# Altium PCB CameraJPEG.PcbDoc
Units mm, origin at the board's own origin, x right, y up, seen from the top; angles counter-clockwise.
Board outline 39.24 x 43.43 mm, 2 copper layers (Top Layer, Bottom Layer); 64 components, 59 nets, 243 pads, 8 vias.
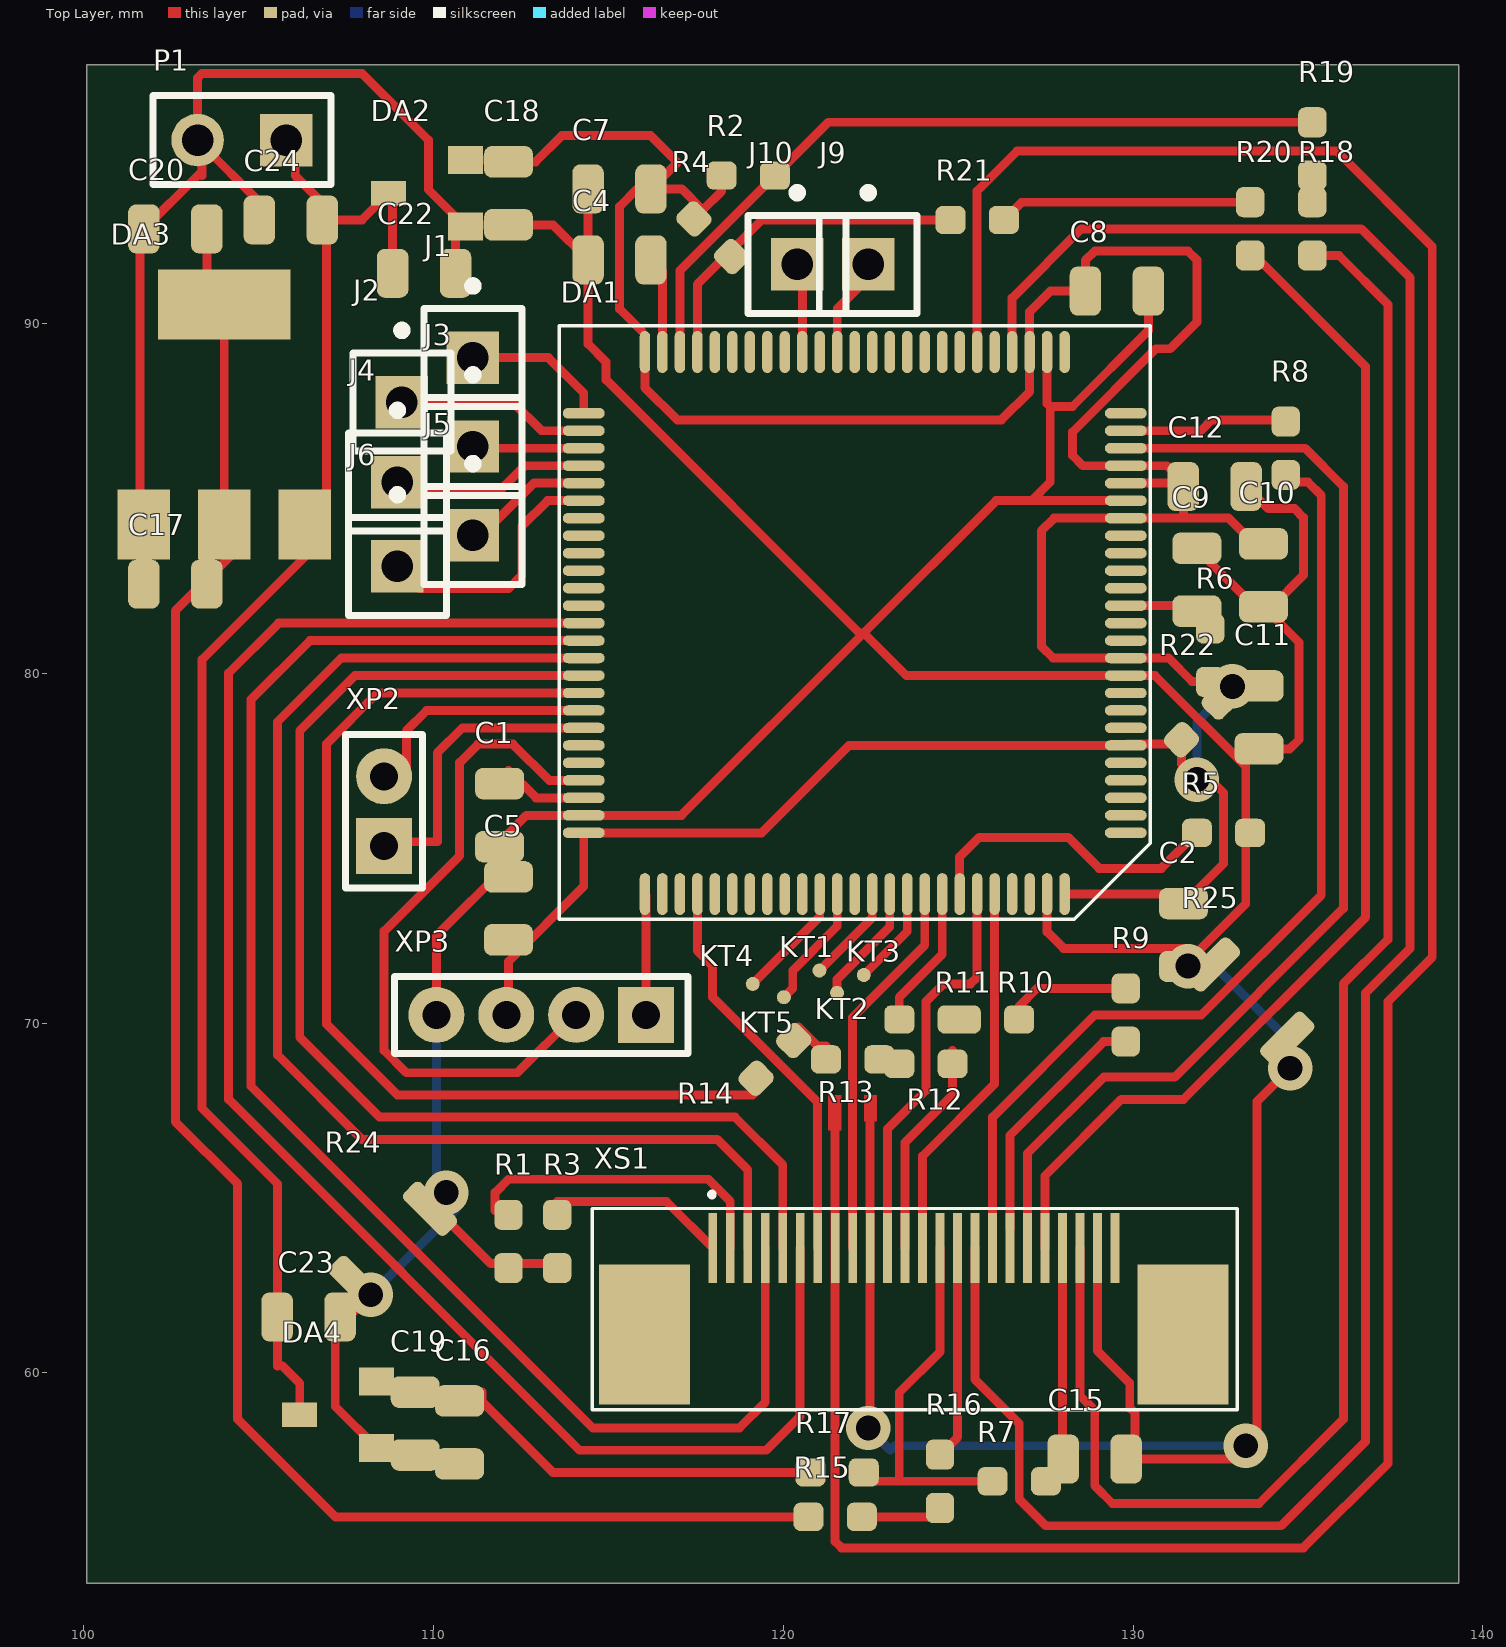
[diagram p0: Top Layer view]
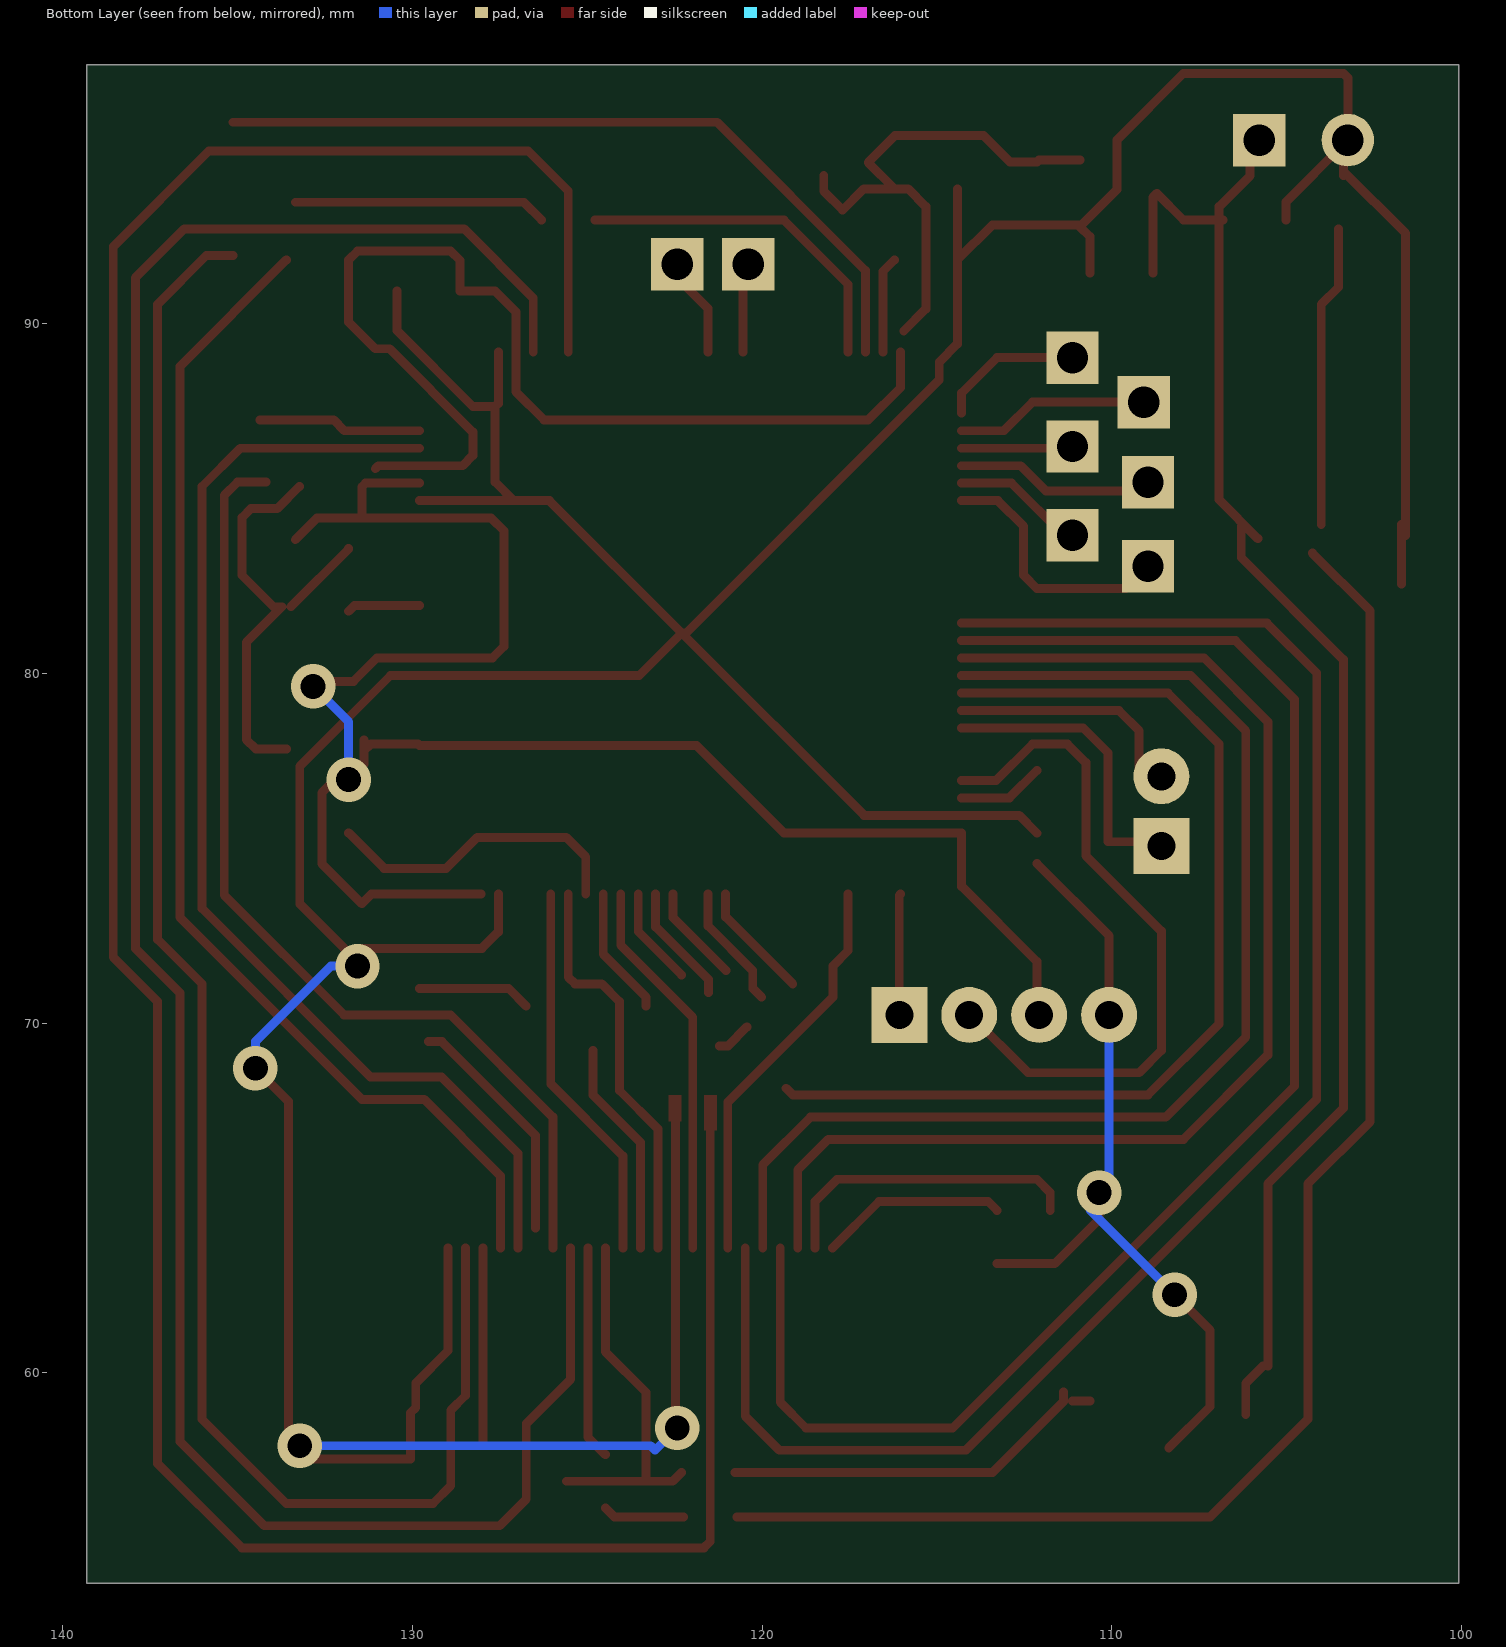
[diagram p1: Bottom Layer view, seen from below]
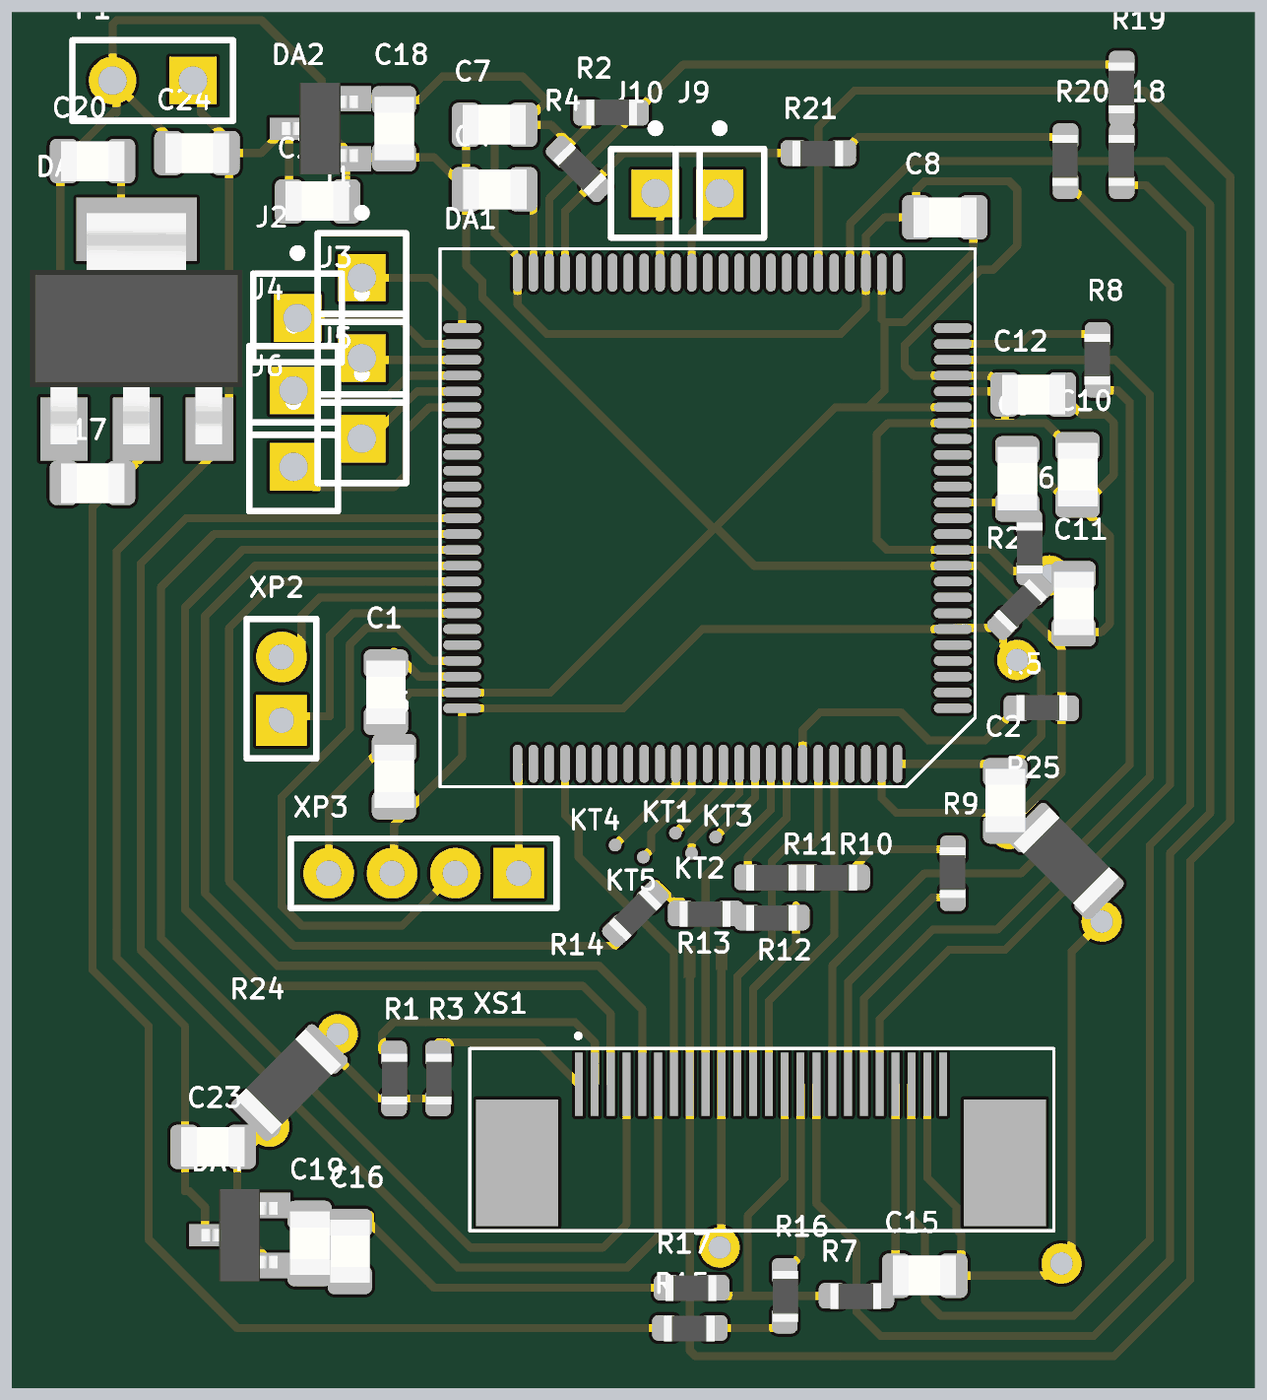
[diagram p2: 3D render of the assembled board from above, using the file's embedded part models]

## Layer stack, top to bottom
Top Solder: solder mask 0.0102, Solder Resist, Dk 3.5
Top Layer: signal copper 0.0356
Dielectric 1: dielectric 0.32, FR-4, Dk 4.8
Bottom Layer: signal copper 0.0356
Bottom Solder: solder mask 0.0102, Solder Resist, Dk 3.5

## Board outline
100.076,53.975 100.076,97.409 139.319,97.409 139.319,53.975

## Design rules (kind name [scope] priority, off if disabled: settings)
Clearance [All] p1: gap=0.1
ComponentClearance [All] p1 off: gap=0.254 collisioncheckmode=3 verticalgap=0.254 showdistances=FALSE
MinimumSolderMaskSliver [All] p1 off: minsoldermaskwidth=0.254
PolygonConnect [All] p1: connectstyle=Relief reliefconductorwidth=0.254 reliefentries=4 polygonreliefangle="90 Angle" airgapwidth=0.254
RoutingVias [All] p1: holewidth=0.711 width=1.27 viastyle="Through Hole" minholewidth=0.711 minwidth=1.27 maxholewidth=0.711 maxwidth=1.27
SilkToSilkClearance [All] p1 off: silktosilkclearance=0.254
SilkToSolderMaskClearance [IsPad] p1 off: minsilkscreentomaskgap=0.254 clearancetoexposedcopper=TRUE
SolderMaskExpansion [All] p1: expansion=0.102
Width [All] p1: maxlimit=0.254 minlimit=0.254 preferedwidth=0.254
26 further rules are at their usual default settings.

## Components (designator, comment, footprint, x,y, rotation, side; value= is the part's Value field where it differs from the comment)
C1 "0.1uF" CAP0805 111.887,75.946 r270 top
C2 "0.1uF" CAP0805 131.445,72.517 r90 top
C4 "0.1uF" CAP0805 115.316,91.821 r0 top
C5 "0.1uF" CAP0805 112.141,73.279 r90 top
C7 "0.1uF" CAP0805 115.316,93.853 r180 top
C8 "0.1uF" CAP0805 129.54,90.932 r0 top
C9 "0.1uF" CAP0805 131.826,82.677 r90 top
C10 "0.1uF" CAP0805 133.731,82.804 r90 top
C11 "0.1uF" CAP0805 133.604,78.74 r90 top
C12 "0.1uF" CAP0805 132.334,85.344 r0 top
C15 "4.7uF" CAP0805 128.905,57.531 r180 top
C16 "4.7uF" CAP0805 110.744,58.293 r90 top
C17 "4.7uF" CAP0805 102.616,82.55 r0 top
C18 "1uF" CAP0805 112.141,93.726 r90 top
C19 "0.22uF" CAP0805 109.474,58.547 r90 top
C20 "1uF" CAP0805 102.616,92.71 r0 top
C22 "0.22uF" CAP0805 109.728,91.44 r180 top
C23 "0.22uF" CAP0805 106.426,61.595 r180 top
C24 "1uF" CAP0805 105.918,92.964 r0 top
DA1 "STM32F407VGT6" STM32F407VGT6 129.794,75.438 r180 top
DA2 "MCP1702T-3002E" SOT23 108.712,93.726 r90 top
DA3 "LD1117S12TR" SOT-223 104.013,90.551 r0 top
DA4 "MCP1702T-3002E" SOT23 106.172,58.801 r90 top
J1 "Socket" PIN1 111.125,89.027 r0 top
J2 "Socket" PIN1 109.093,87.757 r0 top
J3 "Socket" PIN1 111.125,86.487 r0 top
J4 "Socket" PIN1 108.966,85.471 r0 top
J5 "Socket" PIN1 111.125,83.947 r0 top
J6 "Socket" PIN1 108.966,83.058 r0 top
J9 "Socket" PIN1 122.428,91.694 r0 top
J10 "Socket" PIN1 120.396,91.694 r0 top
KT1 "*" PAD 121.031,71.501 r90 top
KT2 "*" PAD 121.539,70.866 r90 top
KT3 "*" PAD 122.301,71.374 r90 top
KT4 "*" PAD 119.126,71.12 r90 top
KT5 "*" PAD 120.015,70.739 r90 top
P1 "Header 2" HDR1X2 105.791,95.25 r180 top
R1 "10k" RES0603 112.141,63.754 r270 top
R2 "10k" RES0603 118.999,94.234 r0 top
R3 "10k" RES0603 113.538,63.754 r270 top
R4 "10k" RES0603 117.983,92.456 r315 top
R5 "10k" RES0603 132.588,75.438 r0 top
R6 "10k" RES0603 132.207,80.518 r270 top
R7 "5.1k" RES0603 126.746,56.896 r180 top
R8 "0" RES0603 134.366,86.438 r90 top
R9 "0" RES0603 129.794,70.231 r90 top
R10 "0" RES0603 125.984,70.104 r180 top
R11 "0" RES0603 124.079,70.104 r180 top
R12 "0" RES0603 124.079,68.834 r180 top
R13 "0" RES0603 121.983,68.961 r180 top
R14 "0" RES0603 119.761,68.961 r225 top
R15 "0" RES0603 121.483,55.88 r180 top
R16 "0" RES0603 124.483,56.896 r270 top
R17 "0" RES0603 121.539,57.15 r180 top
R18 "0" RES0603 135.128,92.71 r90 top
R19 "0" RES0603 135.128,94.996 r90 top
R20 "0" RES0603 133.35,92.71 r90 top
R21 "0" RES0603 125.544,92.964 r180 top
R22 "0" RES0603 131.926,78.64 r45 top
R24 "0" RES1206 108.839,63.627 r45 top
R25 "0" RES1206 133.35,70.612 r315 top
XP2 "Вилка PLS2-2" PLS2-2 108.585,75.057 r180 top
XP3 "Вилка PLS2-4" PLS2-4 116.078,70.231 r270 top
XS1 "Розетка" "Розетка под FPC_1" 117.983,61.722 r90 top

## Footprints (in the part's own frame and the unit in brackets; to place one, negate y for a bottom-side part, rotate by r counter-clockwise, add the part's x,y. Pads: shape width x height; smd on the part's side, far side on the other; paste and mask are expansions set on the pad)
CAP0805 [mm]
  rrect50% 0.9x1.4 smd: 1(-0.9,0) 2(0.9,0)
  body extent -0.99,-0.63 1.01,0.62, height 1.3
HDR1X2 [mm] "Connector; Header; 2 Position"
  rect 1.5x1.5 hole 0.9: 1(0,0)
  round 1.5 hole 0.9: 2(2.54,0)
  silkscreen extent -1.27,-1.27 3.81,1.27
PAD [mm]
  round 0.4 smd: 1(0,0)
PIN1 [mm] "Connector; Plug"
  rect 1.5x1.5 hole 0.9: 1(0,0)
  silkscreen extent -1.4,-1.4 1.4,2.17
PLS2-2 [mm]
  rect 1.6x1.6 hole 0.8: 1(0,0)
  round 1.6 hole 0.8: 2(0,-2)
  silkscreen extent -1.1,-3.2 1.1,1.2
PLS2-4 [mm]
  rect 1.6x1.6 hole 0.8: 1(0,0)
  round 1.6 hole 0.8: 2(0,-2) 3(0,-4) 4(0,-6)
  silkscreen extent -1.1,-7.2 1.1,1.2
RES0603 [mm]
  rrect50% 0.86x0.81 smd: 1(-0.762,0) 2(0.762,0)
  body extent -0.78,-0.38 0.82,0.42, height 0.45
RES1206 [mm]
  rrect50% 0.7x1.7 smd: 1(-1.5,0) 2(1.5,0)
  body extent -1.55,-0.76 1.55,0.84, height 0.55
SOT23 [mm]
  rect 0.8x1 smd: 1(-0.95,-2.2) 2(0.95,-2.2)
  rect 0.7x1 smd: 3(0,0)
  body extent -1.44,-2.29 1.46,0.11, height 1.02
SOT-223 [mm]
  rect 1.5x2 smd: 1(-2.3,-6.3) 2(0,-6.3) 3(2.3,-6.3)
  rect 3.8x2 smd: 4(0,0)
  body extent -3.36,-6.77 3.35,0.52, height 1.8
STM32F407VGT6 [mm]
  oval 1.2x0.3 smd: 1(0,0) 2(0,-0.5) 3(0,-1) 4(0,-1.5) 5(0,-2) 6(0,-2.5) 7(0,-3) 8(0,-3.5) 9(0,-4) 10(0,-4.5) 11(0,-5) 12(0,-5.5) 13(0,-6) 14(0,-6.5) 15(0,-7) 16(0,-7.5) 17(0,-8) 18(0,-8.5) 19(0,-9) 20(0,-9.5) 21(0,-10) 22(0,-10.5) 23(0,-11) 24(0,-11.5) 25(0,-12) 51(15.5,-12) 52(15.5,-11.5) 53(15.5,-11) 54(15.5,-10.5) 55(15.5,-10) 56(15.5,-9.5) 57(15.5,-9) 58(15.5,-8.5) 59(15.5,-8) 60(15.5,-7.5) 61(15.5,-7) 62(15.5,-6.5) 63(15.5,-6) 64(15.5,-5.5) 65(15.5,-5) 66(15.5,-4.5) 67(15.5,-4) 68(15.5,-3.5) 69(15.5,-3) 70(15.5,-2.5) 71(15.5,-2) 72(15.5,-1.5) 73(15.5,-1) 74(15.5,-0.5) 75(15.5,0)
  oval 0.3x1.2 smd: 26(1.75,-13.75) 27(2.25,-13.75) 28(2.75,-13.75) 29(3.25,-13.75) 30(3.75,-13.75) 31(4.25,-13.75) 32(4.75,-13.75) 33(5.25,-13.75) 34(5.75,-13.75) 35(6.25,-13.75) 36(6.75,-13.75) 37(7.25,-13.75) 38(7.75,-13.75) 39(8.25,-13.75) 40(8.75,-13.75) 41(9.25,-13.75) 42(9.75,-13.75) 43(10.25,-13.75) 44(10.75,-13.75) 45(11.25,-13.75) 46(11.75,-13.75) 47(12.25,-13.75) 48(12.75,-13.75) 49(13.25,-13.75) 50(13.75,-13.75) 76(13.75,1.75) 77(13.25,1.75) 78(12.75,1.75) 79(12.25,1.75) 80(11.75,1.75) 81(11.25,1.75) 82(10.75,1.75) 83(10.25,1.75) 84(9.75,1.75) 85(9.25,1.75) 86(8.75,1.75) 87(8.25,1.75) 88(7.75,1.75) 89(7.25,1.75) 90(6.75,1.75) 91(6.25,1.75) 92(5.75,1.75) 93(5.25,1.75) 94(4.75,1.75) 95(4.25,1.75) 96(3.75,1.75) 97(3.25,1.75) 98(2.75,1.75) 99(2.25,1.75) 100(1.75,1.75)
  silkscreen extent -0.7,-14.5 16.2,2.47, body extent -0.7,-14.45 16.2,2.45, height 1.6
"Розетка под FPC_1" [mm]
  rect 2x0.25 smd: 1(1.85,0) 2(1.85,-0.5) 3(1.85,-1) 4(1.85,-1.5) 5(1.85,-2) 6(1.85,-2.5) 7(1.85,-3) 8(1.85,-3.5) 9(1.85,-4) 10(1.85,-4.5) 11(1.85,-5) 12(1.85,-5.5) 13(1.85,-6) 14(1.85,-6.5) 15(1.85,-7) 16(1.85,-7.5) 17(1.85,-8) 18(1.85,-8.5) 19(1.85,-9) 20(1.85,-9.5) 21(1.85,-10) 22(1.85,-10.5) 23(1.85,-11) 24(1.85,-11.5)
  rect 4x2.6 smd: ""(-0.625,1.95) ""(-0.625,-13.45)
  silkscreen extent -2.78,-15 3.38,3.45, body extent -2.73,-14.85 2.95,3.35, height 2

## Part data
C1 C2 C4 C5 C7 C8 C9 C10 C11 C12 C15 C16 C17 C18 C19 C20 C22 C23 C24: library part Capacitor
DA2 DA4: library part 2N7002
DA3: library part DA-AMS1117, "LDO 3.3V 0.5A"
KT1 KT2 KT3 KT4 KT5: library part KT
P1: "Header, 2-Pin"
R1 R2 R3 R4 R5 R6 R7 R8 R9 R10 R11 R12 R13 R14 R15 R16 R17 R18 R19 R20 R21 R22 R24 R25: library part Resistor
XS1: library part "Розетка на плату под шлейф 24_1"

## Via types
v1: diameter 1.27, hole 0.711, Top Layer to Bottom Layer, 8 vias

## Nets (pads, with @x,y where several pads share a name; then routed paths per layer and width w, separated by ;. In a path a pad name is that pad's centre, name@x,y a point inside that pad or via, vN(x,y) a via of type N, cw(c..) or ccw(c..) an arc to the next point about the centre after c; other vN are vias at no path point)
+3,0B: C2.2 C5.1 C7.1 C8.1 C10.2 C11.2 C12.1 C18.2 DA1.6 DA1.11 DA1.19 DA1.21 DA1.22 DA1.28 DA1.50 DA1.75 DA1.100 DA2.2 R2.1 R4.1 R6.2 R22.1 R22.2 XP3.3 | length 101.3
  Top Layer w0.254: DA2.2 112.091,94.676 C18.2 112.914,94.626 113.665,95.377 116.205,95.377 116.967,94.615 116.967,94.604 C7.1 ; XP3.3 112.141,70.294 112.141,71.755 114.294,73.908 DA1.75 119.38,75.438 121.88,77.938 DA1.6 129.834,77.978 131.191,77.978 R22.1@131.387,77.782 ; 115.951,89.789 115.316,90.424 115.316,93.345 115.824,93.853 C7.1 ; DA1.50 116.044,88.172 116.967,87.249 126.238,87.249 127.044,88.055 DA1.28 127.044,90.341 127.635,90.932 C8.1 128.64,91.81 128.905,92.075 131.572,92.075 131.826,91.821 131.826,90.043 131.064,89.281 130.654,89.281 128.27,86.897 128.27,86.233 128.565,85.938 DA1.22 130.978,85.938 C12.1@131.064,85.852 ; R2.1 118.237,93.788 117.698,93.249 117.094,93.853 C7.1 ; DA1.100 131.174,73.688 C2.2 132.588,74.56 132.588,76.581 v1@132.017,77.153 ; DA1.21 131.34,85.438 C12.1 131.445,85.333 131.445,84.438 ; R22.1 R22.1@131.387,77.782 ; v1(131.826,76.962) 131.387,77.401 R22.1@131.387,77.782 ; R6.2@132.207,79.767 131.688,79.767 131.017,80.438 DA1.11 127.715,80.438 127.381,80.772 127.381,84.074 127.745,84.438 DA1.19 131.445,84.438 ; C10.2@133.35,83.82 132.732,84.438 131.445,84.438
  Bottom Layer w0.254: v1(131.826,76.962) 131.826,78.613 v1(132.842,79.629)
+3,4B: C22.2 C23.2 C24.2 DA2.3 DA3.3 DA4.3 P1.1 | length 44.2
  Top Layer w0.254: 105.537,60.198 105.537,65.405 103.378,67.564 103.378,80.391 106.299,83.312 DA3.3@106.299,84.201 ; 105.675,60.198 106.172,59.701 DA4.3 ; DA3.3@105.823,83.852 106.934,84.963 C24.2@106.934,92.964 ; P1.1@106.045,94.996 106.045,94.234 106.934,93.345 C24.2@106.934,92.964 ; C24.2 C24.2@106.934,92.964 ; C22.2 108.828,93.61 DA2.3 107.95,92.964 C24.2@106.934,92.964
AVDD: C15.2 R7.1 XS1.21 | length 5.6
  Top Layer w0.254: C15.2@127.983,58.006 XS1.21
BOOT0: DA1.94 R5.1 | length 8.9
  Top Layer w0.254: DA1.94 125.044,74.752 125.603,75.311 128.143,75.311 129.032,74.422 130.81,74.422 R5.1
CE: DA1.55 J5.1 | length 3.8
  Top Layer w0.254: J5.1 111.379,83.947 112.87,85.438 DA1.55
CSN: DA1.56 J6.1 | length 7.5
  Top Layer w0.254: J6.1 109.601,82.423 112.141,82.423 112.522,82.804 112.522,84.201 113.259,84.938 DA1.56
D0: DA1.63 XS1.6 | length 48.7
  Top Layer w0.254: DA1.63 105.568,81.438 104.14,80.01 104.14,67.818 114.173,57.785 119.507,57.785 120.483,58.761 XS1.6
D1: DA1.64 XS1.4 | length 44.7
  Top Layer w0.254: DA1.64 106.465,80.938 104.775,79.248 104.775,68.199 114.554,58.42 118.745,58.42 119.483,59.158 XS1.4
D2: DA1.65 XS1.3 | length 36.1
  Top Layer w0.254: DA1.65 107.362,80.438 105.537,78.613 105.537,69.088 107.95,66.675 118.11,66.675 118.983,65.802 XS1.3
D3: DA1.66 XS1.5 | length 35.2
  Top Layer w0.254: DA1.66 114.294,79.936 107.749,79.936 106.172,78.359 106.172,69.596 108.458,67.31 118.618,67.31 119.983,65.945 XS1.5
D4: DA1.79 XS1.7 | length 11.5
  Top Layer w0.254: DA1.79 117.544,72.067 117.972,71.639 117.972,70.75 120.983,67.739 XS1.7
D5: DA1.92 XS1.9 | length 11
  Top Layer w0.254: XS1.9 121.983,70.167 124.044,72.228 DA1.92
D6: DA1.95 XS1.11 | length 11.6
  Top Layer w0.254: XS1.11 122.983,66.976 124.079,68.072 124.079,70.612 124.587,71.12 125.349,71.12 125.544,71.315 DA1.95
D7: DA1.96 XS1.13 | length 11
  Top Layer w0.254: XS1.13 123.983,66.198 126.044,68.259 DA1.96
DOVDD: R7.2 R17.1 XS1.14 | length 10.6
  Top Layer w0.254: R17.1 122.555,56.896 123.317,56.896 ; XS1.14 124.483,60.602 123.317,59.436 123.317,56.896 ; R7.2@125.603,56.896 123.317,56.896
DVDD: R16.1 XS1.15 | length 6.1
  Top Layer w0.254: R16.1 124.983,58.158 XS1.15
GND: C1.2 C2.1 C4.1 C5.2 C7.2 C8.2 C9.2 C10.1 C11.1 C12.2 C15.1 C16.1 C17.1 C18.1 C19.1 C20.1 C22.1 C23.1 C24.1 DA1.10 DA1.20 DA1.27 DA1.74 DA1.99 DA2.1 DA3.1 DA4.1 P1.2 R1.2 R3.2 R5.2 R24.1 R24.2 R25.1 R25.2 XP3.4 XS1.10 XS1.23 | length 189.5
  Top Layer w0.254: DA3.1@101.6,83.947 101.6,92.583 103.378,94.361 ; DA3.1 101.716,84.248 C17.1 ; 103.378,94.234 103.378,94.361 ; C24.1 105.018,93.483 P1.2@103.378,95.123 ; R24.1@107.95,61.976 v1(108.204,62.23) v1@108.413,62.439 ; R24.1@108.077,62.103 107.188,61.214 107.188,59.035 DA4.1 ; XP3.4 110.078,72.497 C5.2@112.141,74.56 ; v1(110.363,65.151) 110.363,64.389 111.633,63.119 R3.2@113.284,63.119 ; C22.1 110.628,92.492 DA2.1 ; C1.2@112.141,75.427 112.652,75.938 DA1.74 117.086,75.938 122.301,81.153 ; C7.2 C4.1 ; v1(122.428,58.42) 122.483,58.475 XS1.10 122.483,67.818 ; DA1.99 127.544,72.608 128.016,72.136 v1@131.445,72.136 ; DA1.27 127.544,87.721 127.635,87.63 ; XS1.23 128.983,60.628 129.906,59.705 129.906,59.003 130.059,58.85 130.059,57.531 v1@133.35,57.531 ; DA1.20 127.102,84.938 ; C8.2 130.44,89.8 128.27,87.63 127.635,87.63 ; C2.1 131.561,71.617 v1(131.572,71.628) ; C9.2 131.826,83.555 C10.1@133.477,81.904 ; 131.953,72.136 133.223,73.406 133.223,77.343 130.628,79.938 DA1.10 123.516,79.938 122.301,81.153 ; C12.2 133.869,84.709 134.62,84.709 134.874,84.455 134.874,82.804 133.974,81.904 C10.1 134.747,80.888 134.747,78.105 134.482,77.84 C11.1 ; v1@133.541,57.594 133.541,67.754 v1(134.493,68.707) 134.493,69.469 R25.2 ; 103.378,94.361 P1.2@103.378,95.123 ; P1.2@103.378,95.123 P1.2 103.251,97.028 103.378,97.155 107.95,97.155 109.855,95.25 109.855,93.833 DA2.1 ; DA2.1 110.962,92.826 C18.1 113.411,92.826 C4.1 ; C4.1 114.416,89.419 114.935,88.9 114.935,88.392 122.174,81.153 122.301,81.153 ; 122.301,81.153 126.086,84.938 127.102,84.938 ; 127.102,84.938 127.635,85.471 127.635,87.63
  Bottom Layer w0.254: v1(108.204,62.23) 110.617,64.643 110.617,64.897 v1(110.363,65.151) 110.078,65.436 XP3.4 ; v1(122.428,58.42) 123.063,57.785 123.19,57.912 v1(133.223,57.912) ; v1(131.572,71.628) 132.334,71.628 134.493,69.469 v1(134.493,68.707)
HREF: DA1.29 XS1.16 | length 67.1
  Top Layer w0.254: XS1.16 125.483,59.817 125.476,59.817 126.746,58.547 126.746,56.388 127.508,55.626 134.239,55.626 136.652,58.039 136.652,70.866 137.922,72.136 137.922,91.313 136.525,92.71 128.524,92.71 126.544,90.73 DA1.29
IRQ: DA1.51 J1.1 | length 4.2
  Top Layer w0.254: J1.1 113.284,89.027 114.294,88.017 DA1.51
KT1: DA1.89 KT1.1 | length 2.8
  Top Layer w0.254: KT1.1 122.544,73.014 DA1.89
KT2: DA1.90 KT2.1 | length 3.4
  Top Layer w0.254: KT2.1 121.539,71.247 123.044,72.752 DA1.90
KT3: DA1.91 KT3.1 | length 2.8
  Top Layer w0.254: KT3.1 123.544,72.617 DA1.91
KT4: DA1.86 KT4.1 | length 3.4
  Top Layer w0.254: KT4.1 121.044,73.038 DA1.86
KT5: DA1.87 KT5.1 | length 3.6
  Top Layer w0.254: KT5.1 120.269,70.993 120.269,71.501 121.544,72.776 DA1.87
NetC1_1: C1.1 DA1.73 | length 2.5
  Top Layer w0.254: C1.1@112.141,77.227 112.93,76.438 DA1.73
NetC4_2: C4.2 DA1.49 | length 2.8
  Top Layer w0.254: C4.2 116.544,91.493 DA1.49
NetC16_2: C16.2 C19.2 DA4.2 R17.2 | length 11
  Top Layer w0.254: C16.2@110.617,59.193 C16.2@111.125,59.193 ; C16.2@111.379,59.447 111.379,59.182 113.411,57.15 R17.2
NetC17_2: C17.2 C20.2 DA3.2 DA3.4 R15.2 | length 52.3
  Top Layer w0.254: C20.2 103.516,91.048 DA3.4 DA3.2 ; DA3.2@104.267,83.439 102.616,81.788 102.616,67.183 104.394,65.405 104.394,58.674 107.188,55.88 R15.2
NetDA1_24: DA1.24 R8.2 | length 4.7
  Top Layer w0.254: DA1.24 131.945,86.938 132.256,87.249 R8.2@134.366,87.249
NetDA1_39: DA1.39 J9.1 | length 2.9
  Top Layer w0.254: DA1.39 121.544,90.429 122.428,91.313 J9.1
NetDA1_41: DA1.41 J10.1 | length 2.6
  Top Layer w0.254: J10.1 120.544,91.546 DA1.41
NetR1_1: R1.1 XS1.2 | length 9
  Top Layer w0.254: R1.1@111.76,64.643 111.76,65.151 112.141,65.532 117.856,65.532 118.483,64.905 XS1.2
NetR3_1: R3.1 XS1.1 | length 5.4
  Top Layer w0.254: R3.1@113.284,64.643 113.538,64.897 116.658,64.897 XS1.1
NetR9_2: R9.2 R10.1 | length 3.3
  Top Layer w0.254: R10.1@126.746,70.485 127.254,70.993 R9.2
NetR10_2: R10.2 R11.1
NetR12_2: R12.2 R13.1
NetR13_2: R13.2 R14.1 | length 1
  Top Layer w0.254: R14.1@120.435,69.889 120.982,69.342 R13.2@121.221,69.342
NetR15_1: R15.1 R16.2 | length 2.3
  Top Layer w0.254: R15.1 124.229,55.88 R16.2
NetR18_2: R18.2 R19.1
NetR20_2: R20.2 R21.1 | length 7.3
  Top Layer w0.254: R21.1 126.814,93.472 R20.2
NRST: C9.1 DA1.14 R6.1 | length 2.1
  Top Layer w0.254: DA1.14 131.665,81.938 C9.1
PCLK: DA1.31 XS1.8 | length 84
  Top Layer w0.254: 121.483,67.747 XS1.8 121.483,55.174 121.666,54.991 134.874,54.991 137.287,57.404 137.287,70.612 138.557,71.882 138.557,92.202 135.822,94.937 126.687,94.937 125.544,93.794 DA1.31
PWDN: R8.1 XS1.17 | length 28.5
  Top Layer w0.254: XS1.17 125.984,67.31 128.905,70.231 131.953,70.231 135.382,73.66 135.382,85.09 135.001,85.471 R8.1@134.19,85.471
RESETB: DA1.23 XS1.19 | length 33.4
  Top Layer w0.254: XS1.19 126.983,66.277 129.162,68.456 131.194,68.456 136.017,73.279 136.017,85.344 134.923,86.438 DA1.23
RX_1: DA1.69 XP2.1 | length 7.9
  Top Layer w0.254: XP2.1@109.22,75.184 110.109,75.184 110.109,77.724 110.823,78.438 DA1.69
SCLK: R20.1 XS1.20 | length 34.4
  Top Layer w0.254: XS1.20 127.483,65.634 129.667,67.818 131.445,67.818 136.652,73.025 136.652,88.773 R20.1@133.604,91.821
SCLK_1: DA1.47 R4.2 R21.2 | length 9.9
  Top Layer w0.254: DA1.47 117.544,91.128 119.38,92.964 R21.2
SDA: R18.1 XS1.22 | length 50.4
  Top Layer w0.254: XS1.22 128.483,59.35 128.905,58.928 128.905,56.769 129.413,56.261 133.604,56.261 136.017,58.674 136.017,71.12 137.287,72.39 137.287,90.551 135.89,91.948 R18.1
SDA_1: DA1.48 R2.2 R19.2 | length 22.2
  Top Layer w0.254: DA1.48 117.044,91.517 121.285,95.758 R19.2
SPI2_MISO: DA1.53 J3.1 | length 3.2
  Top Layer w0.254: J3.1 111.174,86.438 DA1.53
SPI2_MOSI: DA1.54 J4.1 | length 5.7
  Top Layer w0.254: J4.1 109.22,85.217 111.887,85.217 112.608,85.938 DA1.54
SPI2_SCK: DA1.52 J2.1 | length 5.5
  Top Layer w0.254: J2.1 112.268,87.757 113.087,86.938 DA1.52
SWCLK: DA1.76 XP3.1 | length 2.8
  Top Layer w0.254: DA1.76 116.078,73.654 XP3.1@116.078,70.866
SWDIO: DA1.72 XP3.2 | length 19.8
  Top Layer w0.254: XP3.2 114.046,70.231 112.395,68.58 109.22,68.58 108.585,69.215 108.585,72.628 110.744,74.787 110.744,77.449 111.273,77.978 112.268,77.978 113.308,76.938 DA1.72
TX_1: DA1.68 XP2.2 | length 6.5
  Top Layer w0.254: XP2.2@109.22,77.184 109.22,78.359 109.799,78.938 DA1.68
VSYNC: R9.1 XS1.18 | length 6.8
  Top Layer w0.254: XS1.18@126.483,64.135 126.483,66.793 129.159,69.469 R9.1@129.54,69.469
VSYNC_2: DA1.93 R11.2 | length 3.7
  Top Layer w0.254: R11.2@123.317,70.485 123.317,70.739 124.544,71.966 DA1.93
XCLK: R12.1 XS1.12 | length 6.2
  Top Layer w0.254: XS1.12 123.483,66.587 124.841,67.945 R12.1@124.841,69.215
XCLK1: DA1.67 R14.2 | length 29.3
  Top Layer w0.254: DA1.67 108.394,79.438 106.934,77.978 106.934,69.977 108.966,67.945 119.126,67.945 R14.2@119.316,68.135
pads on no net: DA1.1 DA1.2 DA1.3 DA1.4 DA1.5 DA1.7 DA1.8 DA1.9 DA1.12 DA1.13 DA1.15 DA1.16 DA1.17 DA1.18 DA1.25 DA1.26 DA1.30 DA1.32 DA1.33 DA1.34 DA1.35 DA1.36 DA1.37 DA1.38 DA1.40 DA1.42 DA1.43 DA1.44 DA1.45 DA1.46 DA1.57 DA1.58 DA1.59 DA1.60 DA1.61 DA1.62 DA1.70 DA1.71 DA1.77 DA1.78 DA1.80 DA1.81 DA1.82 DA1.83 DA1.84 DA1.85 DA1.88 DA1.97 DA1.98 XS1. XS1.24

## Other copper
Top Layer:
  rectangle net PCLK: 121.285,66.929 121.666,67.945
  rectangle net GND: 122.301,67.183 122.682,67.945

## Silkscreen, mask and mechanical layers (free items; w line width, h text height)
Mechanical 2:
  the board outline again, w0.254